# Altium PCB GPT_NLP_DC_Board.PcbDoc
Units mil, origin at the board's own origin, x right, y up, seen from the top; angles counter-clockwise.
Board outline 10710 x 6395 mil, 2 copper layers (Top Layer, Bottom Layer); 48 components, 37 nets, 185 pads, 63 vias.
Unrouted connection lines stored in the file: 3.
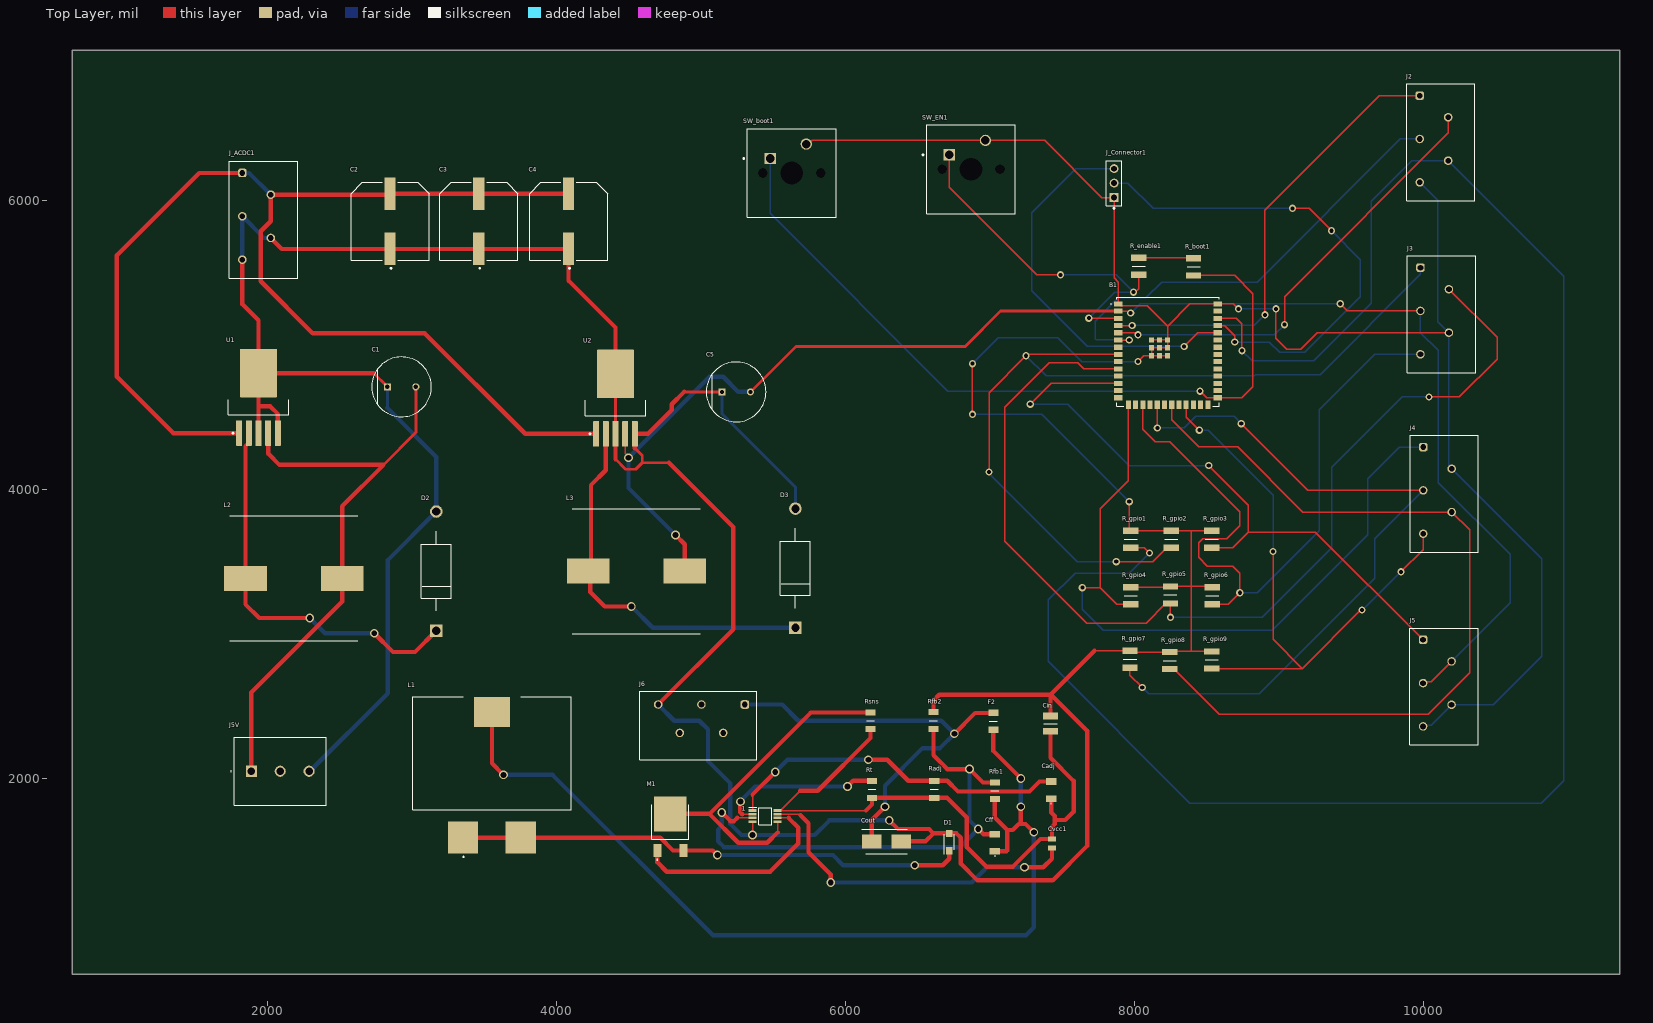
[diagram p0: Top Layer view]
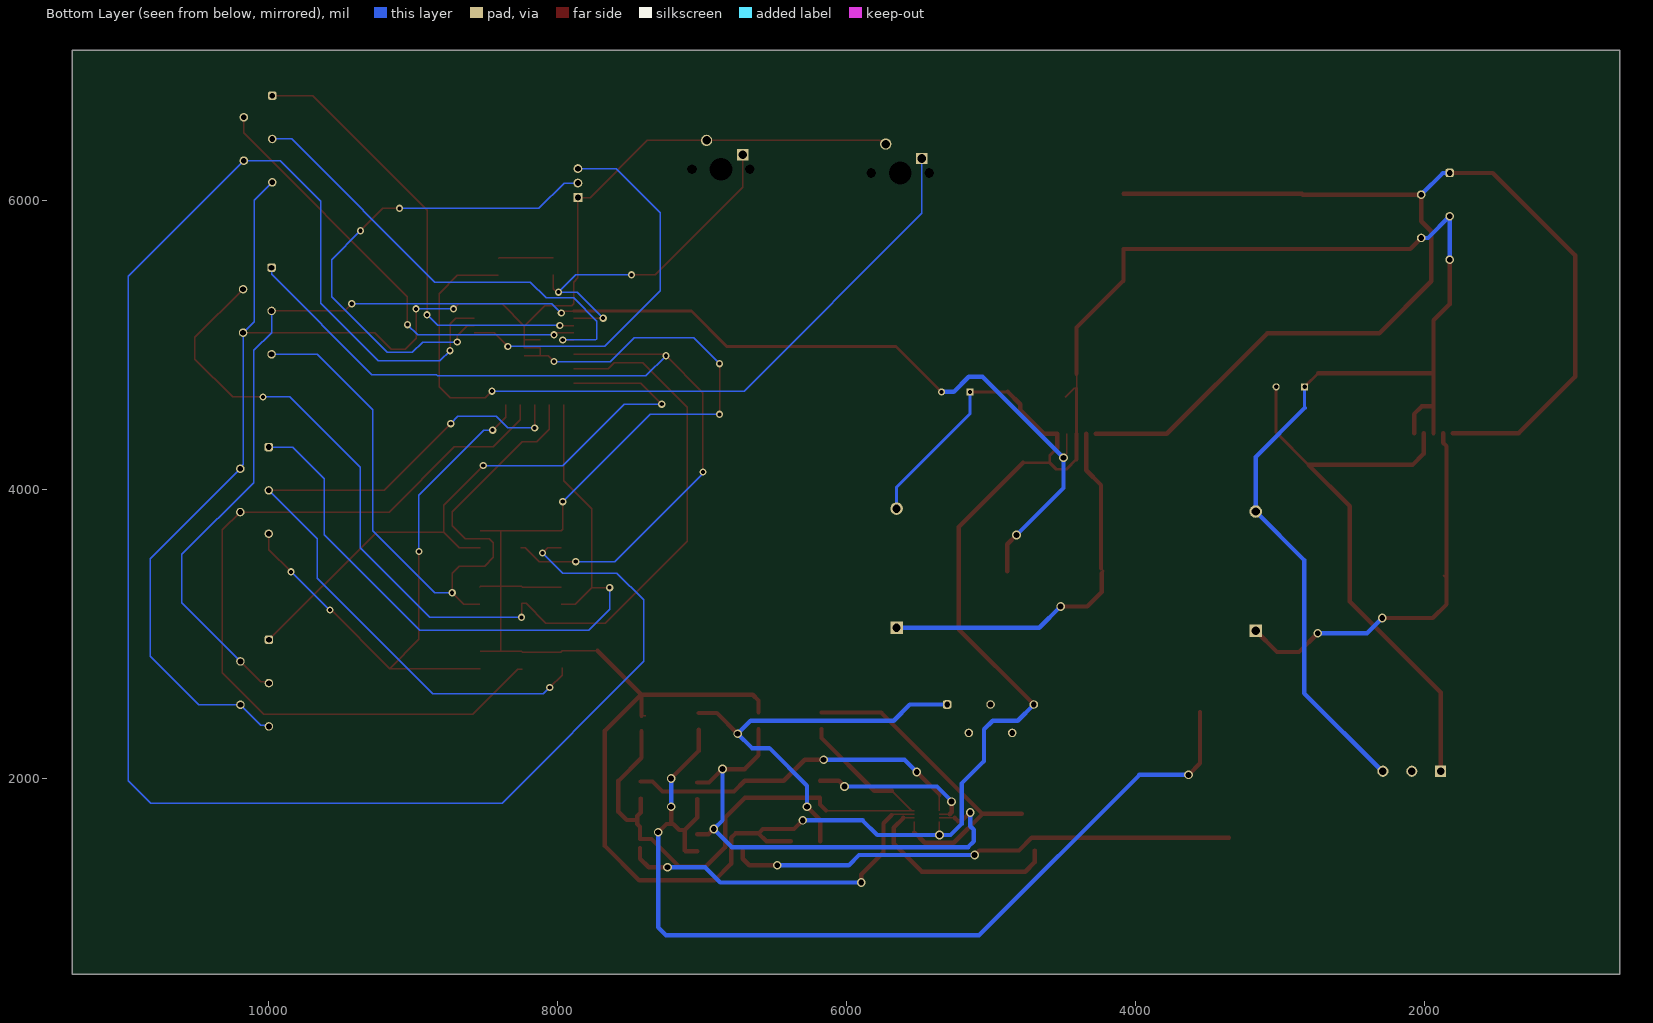
[diagram p1: Bottom Layer view, seen from below]
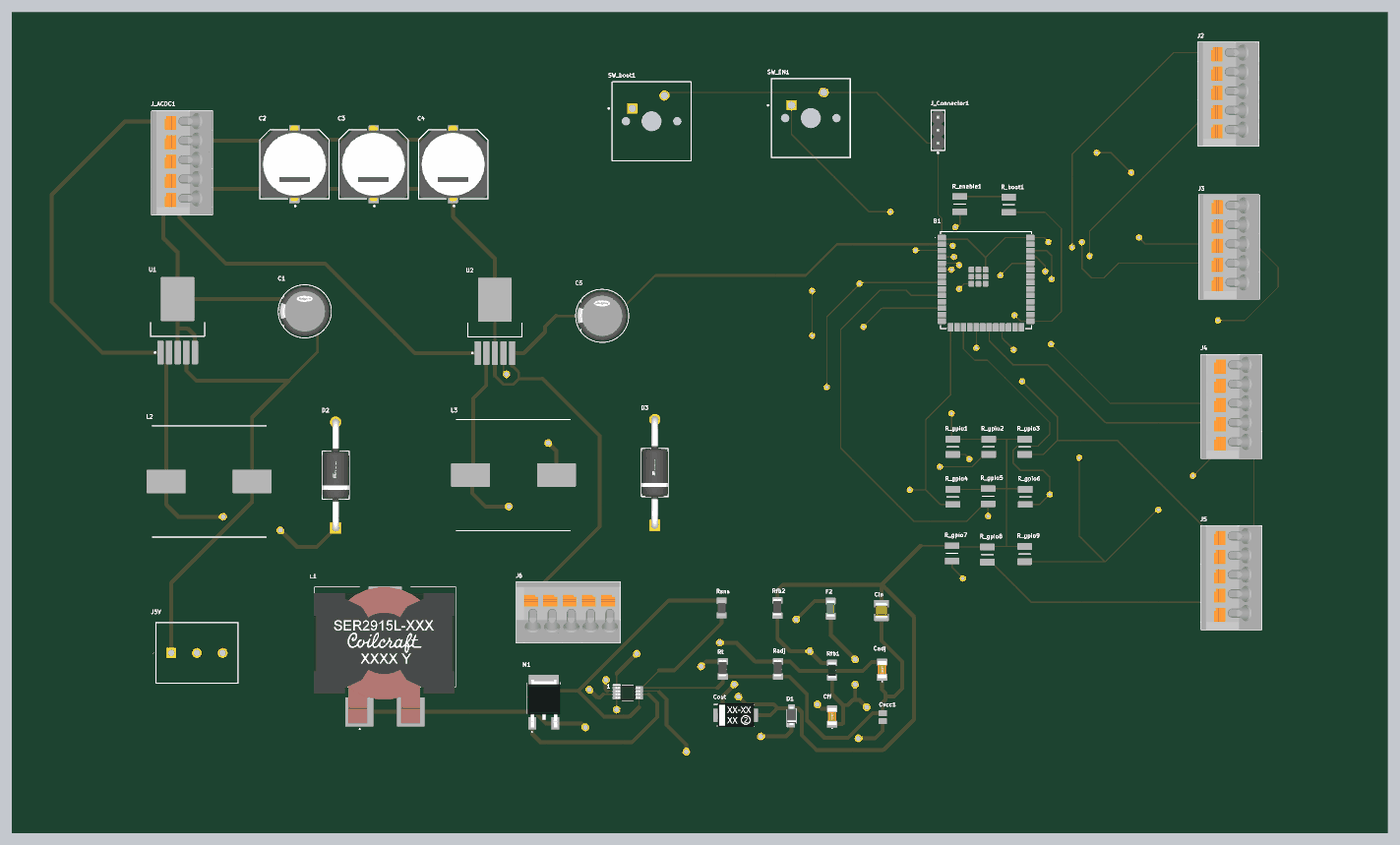
[diagram p2: 3D render of the assembled board from above, using the file's embedded part models]

## Layer stack, top to bottom
Top Solder: solder mask 0.4, Solder Resist, Dk 3.5
Top Layer: signal copper 1.4
Dielectric 1: dielectric 12.6, FR-4, Dk 4.8
Bottom Layer: signal copper 1.4
Bottom Solder: solder mask 0.4, Solder Resist, Dk 3.5

## Board outline
650,645 650,7040 11360,7040 11360,645

## Design rules (kind name [scope] priority, off if disabled: settings)
Clearance [All] p1: gap=5 ignorepadtopadclearanceinfootprint=FALSE
HoleSize [All] p1: absolutevalues=TRUE maxlimit=250 minlimit=1 maxpercent=80.000 minpercent=20.000
MinimumSolderMaskSliver [All] p1: minsoldermaskwidth=5
PasteMaskExpansion [All] p1: expansion=4
PolygonConnect [All] p1: connectstyle=Relief reliefconductorwidth=10 reliefentries=4 polygonreliefangle="90 Angle" airgapwidth=10
RoutingVias [All] p1: holewidth=28 width=50 viastyle="Through Hole" minholewidth=28 minwidth=50 maxholewidth=28 maxwidth=50
SilkToSilkClearance [All] p1: silktosilkclearance=5
SilkToSolderMaskClearance [IsPad] p1: minsilkscreentomaskgap=4 clearancetoexposedcopper=TRUE
SolderMaskExpansion [All] p1: expansion=4 istentingtop=FALSE
SupplyNets "Schematic Supply Nets_1" [InNet('GND')] p1: voltage=0.000
SupplyNets "Schematic Supply Nets_5" [InNet('19V')] p2: voltage=0.000
SupplyNets "Schematic Supply Nets_4" [InNet('REC_Volt')] p3: voltage=0.000
SupplyNets "Schematic Supply Nets_2" [InNet('3.3V')] p4: voltage=0.000
SupplyNets "Schematic Supply Nets" [InNet('5V_Buck')] p5: voltage=0.000
Width [All] p1: maxlimit=1000 minlimit=5 preferedwidth=10
25 further rules are at their usual default settings.

## Components (designator, comment, footprint, x,y, rotation, side; value= is the part's Value field where it differs from the comment)
1 "LM25085AMM_NOPB" SOP65P490X110-8N 5445,1740 r0 top
B1 "ESP32-S3-WROOM-1U-N16" ESP32S3WROOM1UN16 8233.94,4952.95 r0 top
C1 "35ZLH330MEFC10X12.5" FP-35ZLH330MEFC10X12_5-MFG 2930,4710 r0 top
C2 "EEV-FK1V681Q" FP-FKH13-MFG 2850,5855 r90 top
C3 "EEV-FK1V681Q" FP-FKH13-MFG 3465,5855 r90 top
C4 "EEV-FK1V681Q" FP-FKH13-MFG 4085,5855 r90 top
C5 "35ZLH330MEFC10X12.5" FP-35ZLH330MEFC10X12_5-MFG 5245,4675 r0 top
Cadj "C1206C102K5GACTU" C1206 7425,1920 r90 top
Cff "" C1206 7035,1555 r90 top
Cin "MSASU32MSB5106KPNA01" CAPC3225X270N 7420,2380 r90 top
Cout "293D106X9063E2TE3" CAPPM7343X430N 6285,1565 r0 top
Cvcc1 "TMK212BJ474KD-T" CAPC2012X95N 7430,1550 r90 top
D1 "SS24FL" SODFL3617X108N 6720,1560 r90 top
D2 "1N5822" FP-DO-201AD-MFG 3170,3435 r90 top
D3 "1N5822" FP-DO-201AD-MFG 5655,3455 r90 top
F2 "0407006.WR" FUSC3216X98N 7025,2395 r90 top
J2 "691412320005M" 691412320005M 10120.67,6401.57 r90 top
J3 "691412320005M" 691412320005M 10125.67,5211.57 r90 top
J4 "691412320005M" 691412320005M 10145,3970 r90 top
J5 "691412320005M" 691412320005M 10143.82,2636.57 r90 top
J5V "1548131" 1548131 1890,2050 r0 top
J6 "691412320005M" 691412320005M 4981.57,2366.18 r0 top
J_ACDC1 "691412320005M" 691412320005M 1973.82,5866.57 r90 top
J_Connector1 "PREC003SAAN-RC" FP-PREC003SAAN-RC-MFG 7860,6120 r90 top
L1 "SER2915L-153KL" SER2918H333KL 3555,2563.94 r0 top
L2 "74435584700" INDM225220X1240N 2185,3385 r0 top
L3 "74435584700" INDM225220X1240N 4555,3435 r0 top
M1 "SUD50P04-08-GE3" SIHD3N50DT4GE3 4790,1666.65 r0 top
R_boot1 "CRCW121010K0JNEAIF" RESC3225X60N 8410,5540 r90 top
R_enable1 "CRCW121010K0JNEAIF" RESC3225X60N 8030,5545 r90 top
R_gpio1 "CRCW121010K0JNEAIF" RESC3225X60N 7975,3655 r90 top
R_gpio2 "CRCW121010K0JNEAIF" RESC3225X60N 8255,3655 r90 top
R_gpio3 "CRCW121010K0JNEAIF" RESC3225X60N 8535,3655 r90 top
R_gpio4 "CRCW121010K0JNEAIF" RESC3225X60N 7975,3265 r90 top
R_gpio5 "CRCW121010K0JNEAIF" RESC3225X60N 8250,3270 r90 top
R_gpio6 "CRCW121010K0JNEAIF" RESC3225X60N 8540,3265 r90 top
R_gpio7 "CRCW121010K0JNEAIF" RESC3225X60N 7970,2825 r90 top
R_gpio8 "CRCW121010K0JNEAIF" RESC3225X60N 8245,2815.94 r90 top
R_gpio9 "CRCW121010K0JNEAIF" RESC3225X60N 8535,2820 r90 top
Radj "CRCW12062K21FKEA" RESC3216X60N 6615,1925 r90 top
Rfb1 "RC1206FR-0710KL" RESC3116X65N 7035,1915 r90 top
Rfb2 "CRCW1206499RFKEA" RESC3216X60N 6610,2400 r90 top
Rsns "CSR1206FK10L0" RESC3016X65N 6175,2400 r90 top
Rt "CRCW1206665KFKEA" RESC3216X60N 6185,1925 r90 top
SW_boot1 "MX1A-11NW" CHRY-MX1A-11NW_V 5630,6190 r0 top
SW_EN1 "MX1A-11NW" CHRY-MX1A-11NW_V 6870,6215 r0 top
U1 "LM2596S-5.0/NOPB" KTT0005B_M 1940,4637.68 r90 top
U2 "LM2596S-3.3/NOPB" KTT0005B_M 4410,4632.68 r90 top

## Footprints (in the part's own frame and the unit in brackets; to place one, negate y for a bottom-side part, rotate by r counter-clockwise, add the part's x,y. Pads: shape width x height; smd on the part's side, far side on the other; paste and mask are expansions set on the pad)
1548131 [mm]
  rect 1.95x1.95 hole 1.3: 1(0,0)
  round 1.95 hole 1.3: 2(5.08,0) 3(10.16,0)
  silkscreen extent -3.6,-6 13.2,6
691412320005M [mm] "3.81 mm Screwless 45¡ã Entry, 5p"
  rrect50% 1.5x1.5 hole 1: 1(8.215,3.7)
  round 1.5 hole 1: 2(4.405,-1.3) 3(0.595,3.7) 4(-3.215,-1.3) 5(-7.025,3.7)
  silkscreen extent -10.28,-6 10.28,6, body extent -10.27,-6 10.28,6, height 13.28
C1206 [mm]
  rect 1.15x1.8 smd: 1(-1.5,0) 2(1.5,0)
  silkscreen extent -2.4,-0.05 -2.3,0.05, body extent -1.7,-0.9 1.7,0.9, height 1.75
CAPC2012X95N [mm]
  rect 0.96x1.39 smd: 1(-0.79,0) 2(0.79,0)
CAPC3225X270N [mm]
  rect 1.22x2.72 smd: 1(-1.35,0) 2(1.35,0)
  silkscreen extent 0,-1.15 0,1.15, body extent -1.6,-1.25 1.6,1.25, height 2.7
CAPPM7343X430N [mm]
  rect 3.4x2.45 smd: 1(-2.6,0) 2(2.6,0)
  silkscreen extent -4.3,-2.15 3.65,2.15, body extent -3.59,-2.35 3.6,2.35, height 4.12
CHRY-MX1A-11NW_V [mm] "THD, 2-Leads, Body 15.6x15.6mm"
  rect 2x2 hole 1.499 paste-2539.97: 1(-3.81,2.54)
  round 2 hole 1.499 paste-2539.97: 2(2.54,5.08)
  round 0 hole 3.988 unplated paste-2539.97: MH1(0,0)
  round 0 hole 1.702 unplated paste-2539.97: MH2(-5.08,0) MH3(5.08,0)
  silkscreen extent -8.57,-7.8 7.8,7.8, body extent -7.8,-7.8 7.8,7.8, height 15.2
ESP32S3WROOM1UN16 [mm]
  rect 1.5x0.9 smd: 1(-8.75,8.41) 2(-8.75,7.14) 3(-8.75,5.87) 4(-8.75,4.6) 5(-8.75,3.33) 6(-8.75,2.06) 7(-8.75,0.79) 8(-8.75,-0.48) 9(-8.75,-1.75) 10(-8.75,-3.02) 11(-8.75,-4.29) 12(-8.75,-5.56) 13(-8.75,-6.83) 14(-8.75,-8.1) 27(8.75,-8.1) 28(8.75,-6.83) 29(8.75,-5.56) 30(8.75,-4.29) 31(8.75,-3.02) 32(8.75,-1.75) 33(8.75,-0.48) 34(8.75,0.79) 35(8.75,2.06) 36(8.75,3.33) 37(8.75,4.6) 38(8.75,5.87) 39(8.75,7.14) 40(8.75,8.41)
  rect 0.9x1.5 smd: 15(-6.985,-9.35) 16(-5.715,-9.35) 17(-4.445,-9.35) 18(-3.175,-9.35) 19(-1.905,-9.35) 20(-0.635,-9.35) 21(0.635,-9.35) 22(1.905,-9.35) 23(3.175,-9.35) 24(4.445,-9.35) 25(5.715,-9.35) 26(6.985,-9.35)
  rect 0.9x0.9 smd: 41(-1.5,0.69) 42(-1.5,2.09) 43(-2.9,2.09) 44(-2.9,0.69) 45(-2.9,-0.71) 46(-1.5,-0.71) 47(-0.1,-0.71) 48(-0.1,0.69) 49(-0.1,2.09)
  silkscreen extent -10.1,-9.6 9,9.6
FP-35ZLH330MEFC10X12_5-MFG [mm]
  rect 1.25x1.25 hole 0.75 paste-2539.97 mask+0: 1(-2.5,0)
  round 1.25 hole 0.75 paste-2539.97 mask+0: 2(2.5,0)
  silkscreen extent -5.25,-5.25 5.25,5.25, body extent -5.35,-5.35 5.35,5.35, height 0.25
FP-DO-201AD-MFG [mm]
  rect 2.2x2.2 hole 1.45 paste-2539.97 mask+0: 1(-10.47,0)
  round 2.2 hole 1.45 paste-2539.97 mask+0: 2(10.47,0)
  silkscreen extent -7,-2.65 7,2.65, body extent -11.67,-2.75 11.67,2.75, height 0.25
FP-FKH13-MFG [mm]
  rect 5.7x2 smd paste+0 mask+0: 1(-4.85,0) 2(4.85,0)
  silkscreen extent -8.37,-6.85 6.85,6.85, body extent -7.95,-7.1 7.95,7.1, height 0.25
FP-PREC003SAAN-RC-MFG [mm]
  rect 1.55x1.55 hole 1 paste-2539.97 mask+0: 1(-2.54,0)
  round 1.55 hole 1 paste-2539.97 mask+0: 2(0,0) 3(2.54,0)
  silkscreen extent -4.57,-1.37 3.96,1.37, body extent -4.06,-1.47 4.06,1.47, height 0.25
FUSC3216X98N [mm]
  rect 1.14x1.75 smd: 1(-1.48,0) 2(1.48,0)
  silkscreen extent 0,-0.69 0,0.69, body extent -1.6,-0.79 1.6,0.79, height 0.98
INDM225220X1240N [mm]
  rect 7.5x4.4 smd: 1(-8.5,0) 2(8.5,0)
  silkscreen extent -11.25,-11 11.25,11
KTT0005B_M [mm] "DPAK, 5-Leads, Body 10.65x9.65mm, Pitch 1.7mm, IPC Low Density"
  rrect10% 4.45x1.05 smd: 1(-6.3,3.4) 2(-6.3,1.7) 3(-6.3,0) 4(-6.3,-1.7) 5(-6.3,-3.4)
  rrect2% 8.5x6.45 smd: 6(4.25,0)
  silkscreen extent -6.42,-5.35 -0.4,5.35, body extent -3.1,-5.32 6.55,5.33, height 4.83
RESC3016X65N [mm]
  rect 1.05x1.75 smd: 1(-1.45,0) 2(1.45,0)
  silkscreen extent 0,-0.67 0,0.67, body extent -1.52,-0.78 1.53,0.77, height 0.55
RESC3116X65N [mm]
  rect 1.05x1.75 smd: 1(-1.45,0) 2(1.45,0)
  silkscreen extent 0,-0.7 0,0.7, body extent -1.55,-0.8 1.55,0.8, height 0.65
RESC3216X60N [mm]
  rect 1.05x1.8 smd: 1(-1.5,0) 2(1.5,0)
  silkscreen extent 0,-0.7 0,0.7, body extent -1.42,-0.74 1.78,0.86, height 0.55
RESC3225X60N [mm]
  rect 1.1x2.7 smd: 1(-1.5,0) 2(1.5,0)
  silkscreen extent 0,-1.15 0,1.15
SER2918H333KL [mm]
  rect 5.33x5.59 smd: 1(-5.075,-24.715) 2(5.075,-24.715)
  rect 6.35x5.28 smd: 3(0,-2.64)
  silkscreen extent -13.95,-28.2 13.95,0, body extent -14.12,-27.06 13.78,-0.02, height 15.59
SIHD3N50DT4GE3 [mil]
  rect 55x90 smd: 1(-90,-165) 3(90,-165)
  rect 224.02x243.31 smd: 2(0,88.35)
  silkscreen extent -128,-234 128,152, body extent -123,-195 127,175, height 93
SODFL3617X108N [mm]
  rect 1.26x1.17 smd: 1(-1.525,0) 2(1.525,0)
  silkscreen extent -2.15,-0.86 1.38,0.86, body extent -1.8,-0.86 1.8,0.86, height 1.08
SOP65P490X110-8N [mm]
  rect 1.4x0.45 smd: 1(-2.2,0.975) 2(-2.2,0.325) 3(-2.2,-0.325) 4(-2.2,-0.975) 5(2.2,-0.975) 6(2.2,-0.325) 7(2.2,0.325) 8(2.2,0.975)
  silkscreen extent -2.9,-1.5 1.15,1.55, body extent -2.45,-1.5 2.45,1.5, height 1.1

## Part data
1: "Integrated Circuit", Manufacturer_Name="Texas Instruments", Manufacturer_Part_Number=LM25085AMM/NOPB, Mouser Part Number=926-LM25085AMM/NOPB, Datasheet Link=http://www.ti.com/lit/gpn/LM25085A, Height=1.1mm, Mouser Price/Stock=https://www.mouser.co.uk/ProductDetail/Texas-Instruments/LM25085AMM-NOPB?qs=X1J7HmVL2ZFzLd0kBZ%2FkDw%3D%3D
B1: "Multiprotocol Modules SMD Module, ESP32-S3, 16 MB SPI Flash, IPEX Antenna Connector", Manufacturer_Name="Espressif Systems", Mouser Part Number=356-ESP32S3WROM1UN16, Datasheet Link=https://www.espressif.com/sites/default/files/documentation/esp32-s3-wroom-1_wroom-1u_datasheet_en.pdf, Geometry.Height=3.35mm, Manufacturer_Part_Number=ESP32-S3-WROOM-1U-N16, Mouser Price/Stock=https://www.mouser.co.uk/ProductDetail/Espressif-Systems/ESP32-S3-WROOM-1U-N16?qs=Li%252BoUPsLEntAI1ynUyotnA%3D%3D
C1 C5: library part CMP-01474-19941892-1, "35ZLH330MEFC10X12.5 Radial Can ALUMINUM ELECTROLYTIC CAPACITOR ZLH 35V 330muF ±20% 0.394Dia 10.00mm", Capacitance=330µF, Case/Package=Radial, Dielectric Material=Aluminium, ESR (Equivalent Series Resistance)=39mΩ, Leakage Current=3µA, Max Operating Temperature=105°C, Min Operating Temperature=-40°C, Ripple Current=1.33A, Tolerance=20%, Voltage=35V, Diameter=10mm, Dissipation Factor=12%, Features="General Purpose", Height=12.5mm, Height - Seated (Max)=13.9954mm, Impedance=39mΩ, Lead Diameter=600µm, Lead Free="Lead Free", Lead Pitch=5mm, Life (Hours)=10000hours, Mount="Through Hole", NexarPartId=19941892, Number of Pins=2, Radiation Hardening=No, REACH SVHC="No SVHC", Ripple Current (AC)=1.33A, RoHS=Compliant, Schedule B=8532220020, Termination=Radial, Voltage Rating=35V, Voltage Rating (AC)=35V, Voltage Rating (DC)=35V
C2 C3 C4: library part CMP-05427-002172-1, "CAP ALUM 680UF 20% 35V SMD", Capacitance=680uF, Case/Package=Radial, ESR (Equivalent Series Resistance)=60mR, Leakage Current=3uA, Max Operating Temperature=105°C, Min Operating Temperature=-55°C, Package Quantity=200, Ratings=AEC-Q200, Ripple Current=1.1A, Tolerance=20%, Voltage=35V, Construction=Cylindrical, Contact Plating=Tin, Diameter=12.5mm, Height=13.5mm, Height - Seated (Max)=0.531inch, Impedance=60mR, Lead Free="Lead Free", Length=14mm, Life (Hours)=5000Hour, Material=Aluminium, Mount="Surface Mount", Packaging="Tape and Reel", Radiation Hardening=No, Reach SVHC Compliant=Yes, Ripple Current (AC)=1.1A, RoHS Compliant=Yes, Series=FK, Termination=SMD/SMT, Voltage Rating=35V, Voltage Rating (DC)=35V, Width=900um
Cadj: "Capacitor", Manufacturer_Name=YAGEO, Datasheet Link=https://content.kemet.com/datasheets/KEM_C1003_C0G_SMD.pdf, Manufacturer_Part_Number=C1206C102K5GACTU
Cff: library part C1206C333K5RACTU, "Capacitor", Manufacturer_Name=YAGEO, Mouser Part Number=80-C1206C333K5R, Datasheet Link=https://content.kemet.com/datasheets/KEM_C1002_X7R_SMD.pdf, Manufacturer_Part_Number=C1206C333K5RACTU, Mouser Price/Stock=https://www.mouser.com/Search/Refine.aspx?Keyword=80-C1206C333K5R
Cin: "Capacitor", Manufacturer_Name="TAIYO YUDEN", Datasheet Link=https://4donline.ihs.com/images/VipMasterIC/IC/TAIY/TAIY-S-A0018972909/TAIY-S-A0018972909-1.pdf?hkey=61A2E4C270F0397D049F8F05BD4F1054, Height=2.7mm, Manufacturer_Part_Number=MSASU32MSB5106KPNA01
Cout: "Capacitor Polarised", Manufacturer_Name=Vishay, Mouser Part Number=74-293D106X9063E2TE3, Arrow Part Number=293D106X9063E2TE3, Arrow Price/Stock=https://www.arrow.com/en/products/293d106x9063e2te3/vishay, Datasheet Link=http://www.vishay.com/docs/40002/293d.pdf, Height=4.3mm, Manufacturer_Part_Number=293D106X9063E2TE3, Mouser Price/Stock=https://www.mouser.co.uk/ProductDetail/Vishay-Sprague/293D106X9063E2TE3?qs=CPcc0c%2Fon9Gw9HhZerL1xQ%3D%3D
Cvcc1: "TAIYO YUDEN - TMK212BJ474KD-T - CERAMIC CAPACITOR 0.47UF, 25V, X5R, 10%, 0805", Manufacturer_Name="TAIYO YUDEN", Mouser Part Number=963-TMK212BJ474KD-T, Datasheet Link=https://componentsearchengine.com/Datasheets/2/TMK212BJ474KD-T.pdf, Geometry.Height=0.95mm, Manufacturer_Part_Number=TMK212BJ474KD-T, Mouser Price/Stock=https://www.mouser.co.uk/ProductDetail/TAIYO-YUDEN/TMK212BJ474KD-T?qs=PzICbMaShUcnyRLJVHq5%252BA%3D%3D
D1: "Schottky Diode", Manufacturer_Name=onsemi, Mouser Part Number=512-SS24FL, Arrow Part Number=SS24FL, Arrow Price/Stock=https://www.arrow.com/en/products/ss24fl/on-semiconductor?utm_currency=USD&region=europe, Datasheet Link=https://www.onsemi.com/pub/Collateral/SS26FL-D.PDF, Height=1.08mm, Manufacturer_Part_Number=SS24FL, Mouser Price/Stock=https://www.mouser.co.uk/ProductDetail/onsemi-Fairchild/SS24FL?qs=tqW9UTzndZyvT5hdH%252BfSxg%3D%3D
D2 D3: library part CMP-12187-000025-1, "DIODE SCHOTTKY 40V 3A DO201AD", Forward Current=3A, Manufacturer=STMicroelectronics, Max Junction Temp=+150°C, Max Repetitive Reverse Voltage=40V, Max Surge Forward Current=80A, Package=DO-201AD, Peak Reverse Current=2mA, Temperature="to +150°C", Automotive=No, Category=Diode, ComponentLink2Description=Datasheet, ComponentLink2URL=https://www.st.com/resource/en/datasheet/1n5822.pdf, Device Class L1="Discrete Semiconductors", Device Class L2=Diodes, Device Class L3="Schottky Diodes", Digikey Description="DIODE SCHOTTKY 40V 3A DO201AD", Height=5.3mm, Lead Free=Yes, Manufacturer Part Number=1N5822, Mouser Description="Schottky Diodes & Rectifiers Vr/40V Io/3A BULK", Octopart=https://octopart.com/1n5822-stmicroelectronics-323225, RoHS=TRUE, Temperature Range High=+150°C
F2: "Fuse", Manufacturer_Name=LITTELFUSE, Mouser Part Number=576-0407006.WR, Arrow Part Number=0407006.WR, Arrow Price/Stock=https://www.arrow.com/en/products/0407006.wr/littelfuse?utm_currency=USD&region=nac, Datasheet Link=https://m.littelfuse.com/~/media/electronics/datasheets/littelfuse_fuse_407_datasheet.pdf.pdf, Height=0.985mm, Manufacturer_Part_Number=0407006.WR, Mouser Price/Stock=https://www.mouser.co.uk/ProductDetail/Littelfuse/0407006.WR?qs=sPbYRqrBIVmH0oD7q%252BOKfw%3D%3D
J2 J3 J4 J5 J6 J_ACDC1: library part CMP-03913-78871500-2, "Terminal Block, 3.81MM Pitch, 45 Deg, Screwless, 16 -30 AWG, 5 Pins", Lead Pitch=3.81mm, Number of Pins=5, Packaging=Box
J5V: "Pluggable Terminal Blocks SMKDSN 1,5/ 3-5,08 SPE", Manufacturer_Name="Phoenix Contact", Mouser Part Number=651-1548131, Datasheet Link=https://www.phoenixcontact.com/en-be/products/pcb-terminal-block-smkdsn-15-3-508-spe-1548131, Geometry.Height=11.15mm, Manufacturer_Part_Number=1548131, Mouser Price/Stock=https://www.mouser.co.uk/ProductDetail/Phoenix-Contact/1548131?qs=ulEaXIWI0c9GjnZKo%252BcsiA%3D%3D
J_Connector1: library part CMP-00595-22265080-1, "PREC003SAAN-RC Conn Header Vert 3POS 2.54MM", Color=Black, Current Rating=3A, Max Operating Temperature=105°C, Min Operating Temperature=-40°C, Connector Type="Male Pin", Contact Material="Nickel, Tin", Contact Mating Length=5.842mm, Contact Plating=Tin, Height=8.74mm, Mount="Through Hole", NexarPartId=22265080, Number of Contacts=3, Number of Positions=3, Number of Rows=1, Packaging=Bulk, Pitch=2.54mm, RoHS=Compliant, Termination=Solder
L1: "Inductor", Manufacturer_Name=COILCRAFT, Mouser Part Number=994-SER2915L-153KL, Datasheet Link=https://www.coilcraft.com/pdfs/ser2900.pdf, Height=17mm, Manufacturer_Part_Number=SER2915L-153KL, Mouser Price/Stock=https://www.mouser.co.uk/ProductDetail/Coilcraft/SER2915L-153KL?qs=zCSbvcPd3pYvEeXdEWrnlg%3D%3D
L2 L3: "Wurth WE-HCI Series Shielded Wire-wound SMD Inductor with a MnZn Core, 47 uH +/-20% Flat Wire Winding 9A Idc", Manufacturer_Name="Wurth Elektronik", Mouser Part Number=710-74435584700, Datasheet Link=https://componentsearchengine.com/Datasheets/2/74435584700.pdf, Geometry.Height=12.4mm, Manufacturer_Part_Number=74435584700, Mouser Price/Stock=https://www.mouser.co.uk/ProductDetail/Wurth-Elektronik/74435584700?qs=BXmE%252BJ0Y7xb1gG6%252BIK8ZPg%3D%3D
M1: "MOSFET (P-Channel)", Manufacturer_Name=Vishay, Mouser Part Number=781-SUD50P04-08-GE3, Arrow Part Number=SUD50P04-08-GE3, Arrow Price/Stock=https://www.arrow.com/en/products/sud50p04-08-ge3/vishay?region=europe, Datasheet Link=https://www.vishay.com/docs/65594/sud50p04-08.pdf, Height=2.38mm, Manufacturer_Part_Number=SUD50P04-08-GE3, Mouser Price/Stock=https://www.mouser.co.uk/ProductDetail/Vishay-Semiconductors/SUD50P04-08-GE3?qs=WX95TUc1y56BTDQkv3VCeQ%3D%3D
R_boot1 R_enable1 R_gpio1 R_gpio2 R_gpio3 R_gpio4 R_gpio5 R_gpio6 R_gpio7 R_gpio8 R_gpio9: "10 kOhms +/-5% 0.5W, 1/2W Chip Resistor 1210 (3225 Metric) Automotive AEC-Q200, Pulse Withstanding Thick Film", Manufacturer_Name=Vishay, Mouser Part Number=71-CRCW121010K0JNAIF, Datasheet Link=https://www.vishay.com/docs/20024/dcrcwife3.pdf, Geometry.Height=0.6mm, Manufacturer_Part_Number=CRCW121010K0JNEAIF, Mouser Price/Stock=https://www.mouser.co.uk/ProductDetail/Vishay-Dale/CRCW121010K0JNEAIF?qs=i8QVZAFTkqQfG5tTLsUS4Q%3D%3D
Radj: "Resistor", Manufacturer_Name=Vishay, Mouser Part Number=71-CRCW1206-2.21K-E3, Arrow Part Number=CRCW12062K21FKEA, Arrow Price/Stock=https://www.arrow.com/en/products/crcw12062k21fkea/vishay, Datasheet Link=http://www.vishay.com/docs/20035/dcrcwe3.pdf, Height=0.6mm, Manufacturer_Part_Number=CRCW12062K21FKEA, Mouser Price/Stock=https://www.mouser.co.uk/ProductDetail/Vishay-Dale/CRCW12062K21FKEA?qs=v%252BxIQaJyuQoaBZMU5qB9Lw%3D%3D
Rfb1: "Resistor", Manufacturer_Name=YAGEO, Mouser Part Number=603-RC1206FR-0710KL, Arrow Part Number=RC1206FR-0710KL, Arrow Price/Stock=https://www.arrow.com/en/products/rc1206fr-0710kl/yageo?utm_currency=USD&region=europe, Datasheet Link=https://www.yageo.com/upload/media/product/app/datasheet/rchip/pyu-rc_group_51_rohs_l.pdf, Height=0.65mm, Manufacturer_Part_Number=RC1206FR-0710KL, Mouser Price/Stock=https://www.mouser.co.uk/ProductDetail/YAGEO/RC1206FR-0710KL?qs=%252BhB4WxZmbVEJV82xdVgRUw%3D%3D
Rfb2: "Resistor", Manufacturer_Name=Vishay, Mouser Part Number=71-CRCW1206-499-E3, Datasheet Link=http://www.vishay.com/docs/20035/dcrcwe3.pdf, Height=0.6mm, Manufacturer_Part_Number=CRCW1206499RFKEA, Mouser Price/Stock=https://www.mouser.com/Search/Refine.aspx?Keyword=71-CRCW1206-499-E3
Rsns: "Resistor", Manufacturer_Name="Stackpole Electronics", Arrow Part Number=CSR1206FK10L0, Arrow Price/Stock=https://www.arrow.com/en/products/csr1206fk10l0/stackpole-electronics?region=nac, Datasheet Link=https://cs.seielect.com/catalog/SEI-CSR_CSRN.pdf, Height=0.65mm, Manufacturer_Part_Number=CSR1206FK10L0
Rt: "Resistor", Manufacturer_Name=Vishay, Height=0.6mm, Manufacturer_Part_Number=CRCW1206665KFKEA
SW_boot1 SW_EN1: library part CMP-2000-06786-1, "Keylock Switch, 12 V, -10 to 70 degC, 2-Pin THD, RoHS, Bulk", Actuator Color=N/A, Illumination Color=N/R, Manufacturer=Cherry, Maximum AC Voltage Rating=12V, Maximum Contact Resistance=200mOhm, Maximum Current Rating=0.01A, Minimum Insulation Resistance=100MOhm, Operating Force=0.58N, Operating Temperature=-10to70C, Package Description="2-Pin Through Hole Device, Body 15.6 x 15.6 mm", Part No=MX1A11NW, Actuator Length=3.6mm, Actuator Material=N/A, Actuator Style=Button, Body Orientation=Straight, Contact Material=Silver/Gold, Contact Plating=N/A, COO=UK, Datasheet URL=https://cdn.sparkfun.com/datasheets/Components/Switches/MX%20Series.pdf, Datasheet Version=09/2000, Dielectric Strength=N/A, Dimension=15.6x15.6x15.2mm, ECCN=EAR99, Electrical Life=50000000Cycle, Family=MX, Housing Material=N/A, HTS=8536509065, Illumination Type=N/R, IP Rating=N/A, Manufacturer URL=http://cherryswitches.com/cn/, Maximum DC Voltage Rating=12V, Maximum Power Rating=N/A, Mechanical Life=N/A, Mounting=ThroughHole, Mounting Technology=ThroughHole, Number of Terminals=2, Operating Speed=N/A, Package Reference=MX1A-11NW, Packaging=N/A, Pole Throw Configuration=SPST, RoHS=Unknown, Row Spacing=6.35mm, Supplier=CherryElectrical, Switch Configuration=N.O., Terminal Pitch=2.54mm, Terminal Type=PCPins, Total Travel=4.06mm, Type=DesktopProfile
U1: library part CMP-0069-00269-3, "SIMPLE SWITCHER® Power Converter 150 KHz 3A Step-Down Voltage Regulator, 5-pin TO-263, Pb-Free", Manufacturer="Texas Instruments", PackageTopMarking="NSUZXYTTE#*LM2596S*-5.0 P+", PowerWise=N, Code_JEDEC=MO-169-AB, ComponentLink1Description="Datasheet URL", ComponentLink1URL=http://www.ti.com/general/docs/lit/getliterature.tsp?genericPartNumber=LM2596&fileType=pdf, CompType=Switcher, PackageDescription="TO-263, Molded, .400 x .390 x .180in, 5 Lead, .067in Pitch, Surface Mount", PackageReference=KTT0005B, PinCount=5, RoHS=Y
U2: library part CMP-0069-00275-3, "SIMPLE SWITCHER® Power Converter 150 KHz 3A Step-Down Voltage Regulator, 5-pin TO-263, Pb-Free", Manufacturer="Texas Instruments", PackageTopMarking="NSUZXYTTE#*LM2596S*-3.3 P+", PowerWise=N, Code_JEDEC=MO-169-AB, ComponentLink1Description="Datasheet URL", ComponentLink1URL=http://www.ti.com/general/docs/lit/getliterature.tsp?genericPartNumber=LM2596&fileType=pdf, CompType=Switcher, PackageDescription="TO-263, Molded, .400 x .390 x .180in, 5 Lead, .067in Pitch, Surface Mount", PackageReference=KTT0005B, PinCount=5, RoHS=Y

## Via types
v1: diameter 50, hole 28, Top Layer to Bottom Layer, 39 vias
v2: diameter 60, hole 40, Top Layer to Bottom Layer, 24 vias

## Nets (pads, with @x,y where several pads share a name; then routed paths per layer and width w, separated by ;. In a path a pad name is that pad's centre, name@x,y a point inside that pad or via, vN(x,y) a via of type N, cw(c..) or ccw(c..) an arc to the next point about the centre after c; other vN are vias at no path point)
3.3V: B1.2 C5.2 J3.3 J5.2 J5.3 L3.2 U2.4 | length 10272.2
  Top Layer w10: U2.4 4476.93,4250.86 4500,4227.79 v2(4500,4220) ; B1.2 7960.94,5234.06 v1(7975,5220) ; v1(9425,5285) 9475,5235 J3.3 ; J5.3 9998.15,2658.15 10009.39,2669.39 10054.39,2669.39 J5.2
  Top Layer w20: C5.2 5658.43,4990 6830,4990 7074.06,5234.06 B1.2
  Top Layer w30: v2(4825,3685) 4889.65,3620.35 L3.2
  Bottom Layer w10: v1(7975,5220) 8040,5285 v1(9425,5285) ; J3.3 9980,5085 10102.5,4962.5 10102.5,4047.5 10600,3550 10600,3215 J5.2
  Bottom Layer w30: v2(4825,3685) 4500,4010 v2(4500,4220) 5060,4780 5155,4780 5260,4675 C5.2
5V_Buck: C1.2 J5V.1 L2.2 U1.4 | length 4103.5
  Top Layer w20: 2805,4170 3028.43,4393.43 C1.2
  Top Layer w30: J5V.1 1890,2595 2519.65,3224.65 L2.2 2519.65,3884.65 2805,4170 2085,4170 2006.93,4248.07 U1.4
19V: Cout.1 F2.2 J6.1 | length 2915.3
  Top Layer w30: Cout.1 6182.64,1712.64 v2(6275,1805) ; v2(6755,2310) 6898.27,2453.27 F2.2
  Bottom Layer w30: J6.1 5563.15,2511.85 5675,2400 6665,2400 v2(6755,2310) 6655,2210 6535,2210 6275,1950 v2(6275,1805)
DIR: B1.5 J2.2 | length 3090
  Top Layer w10: B1.5 7890.39,5085 8010,5085 v1(8025,5070) ; v1(9040,5140) 9040,5335 10171.85,6466.85 J2.2
  Bottom Layer w10: v1(8025,5070) 8970,5070 v1(9040,5140)
ENABLE: B1.6 J2.3 | length 3204.4
  Top Layer w10: B1.6 7964.06,5034.06 v1(7965,5035)
  Bottom Layer w10: v1(7965,5035) 7735.86,5035 7730,5040.86 7730,5165 7890,5325 8080,5325 8190,5435 8850,5435 9840,6425 J2.3
FB_Pin: 1.3 Cff.2 Rfb1.2 Rfb2.1 | length 3579.7
  Top Layer w10: 5252.2,1727.2 1.3
  Top Layer w30: v2(5145,1765) 5205.07,1704.93 5229.93,1704.93 5252.2,1727.2 ; Rfb2.1 6610,2160 6705,2065 v2(6860,2065) 6952.91,1972.09 Rfb1.2 ; v2(6920,1650) 6955.94,1614.06 Cff.2
  Bottom Layer w30: v2(5145,1765) 5145,1670 5120,1645 5120,1565 5160,1525 6795,1525 v2(6920,1650) 6860,1710 v2(6860,2065)
GND: 1.4 B1.1 B1.40 B1.41 B1.42 B1.43 B1.44 B1.45 B1.46 B1.47 B1.48 B1.49 C1.1 C2.1 C3.1 C4.1 C5.1 Cin.2 Cout.2 D1.2 D2.2 D3.2 J2.5 J3.4 J4.2 J5.4 J5.5 J5V.3 J6.5 J_ACDC1.3 J_ACDC1.4 J_ACDC1.5 J_Connector1.1 R_gpio1.2 R_gpio2.2 R_gpio3.2 R_gpio4.2 R_gpio5.2 R_gpio6.2 R_gpio7.2 R_gpio8.2 R_gpio9.2 Rfb2.2 SW_boot1.2 SW_EN1.2 U1.3 U1.5 U1.6 U2.3 U2.5 U2.6 | length 38538.3
  Top Layer w10: U2.6 4410,4700 4424.14,4700 U2.6@4486.47,4637.68 ; v2(5358.39,1608.39) 1.4 ; SW_boot1.2 5745.23,6390 5770.23,6415 SW_EN1.2 7380,6415 7775,6020 J_Connector1.1 7860,5465 7890,5435 7890,5284.61 B1.1 7902.17,5271.34 8088.66,5271.34 8230,5130 ; v1(6880,4520) v1(6880,4870) ; Cin.2@7390.47,2433.15 Cin.2 ; 7420,2580 7422.91,2580 ; 7724.06,2884.06 R_gpio7.2 7979.06,2875 R_gpio8.2 8249.06,2879.06 8392.03,2879.06 ; v1(7965,3915) 7965,3724.06 R_gpio1.2 R_gpio2.2 8395,3714.06 ; R_gpio4.2 8245,3324.06 R_gpio5.2 8392.5,3329.06 ; v1(8025,4885) 8065,4925 B1.45 ; B1.43 B1.42 B1.49 ; B1.47 B1.46 B1.45 ; R_gpio9.2 8392.03,2879.06 ; R_gpio3.2 8395,3714.06 ; R_gpio6.2 8535,3329.06 8392.5,3329.06 ; v1(8720,5250) 8685.94,5284.06 B1.40 8384.06,5284.06 8230,5130 ; v1(8980,5250) 8980,5045 9055,4970 9150,4970 9265,5085 J3.4 ; B1.45 B1.44 B1.41 B1.48 B1.49 ; B1.49 8230,5130 ; 8392.03,2879.06 8392.5,2879.53 8392.5,3329.06 ; 8392.5,3329.06 8395,3331.56 8395,3714.06
  Top Layer w20: 2736.57,4805 C1.1 ; 4410,4210 4480,4140 4550,4140 4595,4185 ; U2.3 U2.6@4410,4700 ; 4543.86,4286.14 4595,4235 4595,4185 ; 4780,4185 4595,4185 ; 4885,4675 C5.1
  Top Layer w30: J_ACDC1.5 1828.15,5281.85 1940,5170 U1.6 ; U1.3 1940,4575 ; J_ACDC1.4 2100.94,5664.06 C2.1 C3.1 C4.1 4085,5445 4410,5120 U2.6 ; U1.5 2073.86,4521.14 2020,4575 1940,4575 ; 2736.57,4805 U1.6 ; 4410,4210 U2.3 ; 4543.86,4286.14 U2.5 4634.65,4384.65 4800,4550 4800,4590 4885,4675 ; J6.5 5225,3031.85 5225,3740 4780,4185 ; v2(6305,1710) 6365,1650 6580.08,1650 6610.04,1620.04 ; Cout.2 6555,1565 6610.04,1620.04 ; Rfb2.2 6610,2540 6650,2580 7422.91,2580 7673.27,2329.65 7673.27,1533.27 7435,1295 6915,1295 6800,1410 6800,1590 6769.96,1620.04 D1.2 6610.04,1620.04 ; Cin.2 7420,2580 7724.06,2884.06 ; 1940,4575 U1.6
  Bottom Layer w10: J5V.3 J5V.3@2295,2050 ; v1(6880,4520) 7360,4520 v1(7965,3915) ; v1(6880,4870) 7060,5050 7470,5050 7635,4885 v1(8025,4885) ; v1(8720,5250) v1(8980,5250) ; J2.5 10100,6000 10100,5161.85 J3.4 10176.85,4176.03 10196.18,4156.7 J4.2 10820,3519.61 10820,2845 10485,2510 J5.4 10054.39,2369.39 10007.54,2369.39 J5.5
  Bottom Layer w20: 2831.57,4563.43 C1.1 ; C5.1 5146.57,4523.43 5655,4015 D3.2
  Bottom Layer w30: J_ACDC1.5 J_ACDC1.3 1978.15,5740 J_ACDC1.4 ; J5V.3@2295,2050 2835,2590 2835,3512.2 D2.2 3170,4225 2831.57,4563.43 ; J6.5 4816.85,2400 4990,2400 5050,2340 5050,2120 5205,1965 5205,1685 5281.61,1608.39 v2(5358.39,1608.39) 5788.39,1608.39 5890,1710 v2(6305,1710)
GPIO2: B1.38 J2.4 R_gpio1.1 | length 12870.5
  Top Layer w10: R_gpio1.1 8069.06,3595.94 v1(8105,3560) ; B1.38 8705.94,5184.06 8745,5145 v1(8745,4960)
  Bottom Layer w10: v1(8105,3560) 7965,3420 7590,3420 7405,3235 7405,2810 8385,1830 10815,1830 10970,1985 10970,5476.85 J2.4 9920,6275 9640,5995 9640,5290 9240,4890 8815,4890 v1(8745,4960)
GPIO3: B1.15 J4.1 R_gpio4.1 | length 5050.7
  Top Layer w10: v1(7640,3320) 7765,3320 ; B1.15 7958.94,4058.94 7765,3865 7765,3320 ; R_gpio4.1 7879.06,3205.94 7765,3320
  Bottom Layer w10: v1(7640,3320) 7640,3170 7785,3025 8955,3025 9615,3685 9615,4075 9833.43,4293.43 J4.1
GPIO8: B1.12 J5.1 R_gpio3.1 | length 4471
  Top Layer w10: v1(7280,4590) 7424.06,4734.06 B1.12 ; v1(8515,4165) 8790,3890 8790,3705 ; R_gpio3.1 8680.94,3595.94 8790,3705 ; J5.1 9253.15,3705 8790,3705
  Bottom Layer w10: v1(7280,4590) 7540,4590 7965,4165 v1(8515,4165)
GPIO9: B1.17 J3.5 R_gpio6.1 | length 4717
  Top Layer w10: B1.17 8058.94,4416.06 8145,4330 8245,4330 8730,3845 8730,3750 8640,3660 8475,3660 8445,3630 8445,3530 8505,3470 8680,3470 8730,3420 v1(8730,3285) 8650.94,3205.94 R_gpio6.1
  Bottom Layer w10: v1(8730,3285) 8850,3285 9280,3715 9280,4550 9665,4935 J3.5
GPIO11: B1.19 J4.3 R_gpio7.1 | length 5121.8
  Top Layer w10: R_gpio7.1 7970,2715 v1(8055,2630) ; v1(8158.94,4426.06) B1.19 ; v1(8740,4455) 9201.57,3993.43 J4.3
  Bottom Layer w10: v1(8055,2630) 8100,2585 8865,2585 9665,3385 9665,3659.09 J4.3 ; v1(8158.94,4426.06) 8346.06,4426.06 8425,4505 8690,4505 v1(8740,4455)
GPIO13: B1.21 J4.4 R_gpio8.1 | length 5792.1
  Top Layer w10: R_gpio8.1 8276.5,2756.89 8588.39,2445 10035,2445 10320,2730 10320,3719.61 J4.4 9166.57,3843.43 8715,4295 8445,4295 8258.94,4481.06 B1.21
GPIO15: B1.8 J3.1 R_gpio2.1 | length 6237.5
  Top Layer w10: v1(6995,4120) 6995,4670 v1(7250,4925) ; v1@7255,4915 7274.06,4934.06 B1.8 ; v1(7875,3500) 8127.56,3500 8223.5,3595.94 R_gpio2.1
  Bottom Layer w10: v1@6990,4115 7605,3500 v1(7875,3500) ; v1(7250,4925) 7390,4785 8830,4785 8840,4795 9285,4795 9980,5490 J3.1
GPIO17: B1.10 J3.2 R_gpio5.1 | length 7338.7
  Top Layer w10: B1.10 7650.94,4834.06 7610,4875 7410,4875 7102.31,4567.31 7102.31,3642.69 7670,3075 8082.56,3075 8218.5,3210.94 R_gpio5.1 v1(8250,3115) ; v1(10040,4640) 10250,4640 10510,4900 10510,5051.85 J3.2
  Bottom Layer w10: v1(8250,3115) 8885,3115 9367.5,3597.5 9367.5,4152.5 9855,4640 v1(10040,4640)
GPIO21: B1.23 J4.5 R_gpio9.1 | length 4109.9
  Top Layer w10: B1.23 8358.94,4501.06 v1(8450,4410) ; R_gpio9.1 9160.94,2760.94 ; v1(8960,3570) 8960,2961.89 9160.94,2760.94 ; v1@9575,3175 9160.94,2760.94 ; v1(9845,3430) 9999.33,3584.33 J4.5
  Bottom Layer w10: v1(8450,4410) 8510,4410 8960,3960 v1(8960,3570) ; v1(9575,3165) 9577.5,3165 9842.5,3430 v1(9845,3430)
GPIO48: B1.25
GPIO_IO0: B1.27 R_boot1.1 SW_boot1.1 | length 5387.1
  Top Layer w10: R_boot1.1 8694.06,5480.94 8820,5355 8820,4710 8744.06,4634.06 B1.27 8500.94,4634.06 v1(8455,4680)
  Bottom Layer w10: SW_boot1.1 5480,5910 6710,4680 v1(8455,4680)
Isen: 1.5 M1.2 Rsns.2 | length 2334.9
  Top Layer w10: 5531.61,1626.61 1.5
  Top Layer w30: M1.2 5060,1755 ; 5531.61,1626.61 5460,1555 5260,1555 5060,1755 ; Rsns.2 5762.09,2457.09 5060,1755
Mid_ref: 
Net1_1: 1.1 Cadj.2 Radj.2 | length 2396.4
  Top Layer w10: 1.1 5358.39,1888.39
  Top Layer w30: 5358.39,1888.39 v2(5515,2045) ; v2(6160,2130) 6290,2130 6435.94,1984.06 Radj.2 6705.94,1984.06 6780,1910 7275,1910 7344.06,1979.06 Cadj.2
  Bottom Layer w30: v2(5515,2045) 5600,2130 v2(6160,2130)
Net1_2: 1.2 Rt.2 | length 1138.1
  Top Layer w10: 5287.2,1752.8 1.2
  Top Layer w30: v2(5275,1840) 5272.56,1837.56 5272.56,1767.44 5287.2,1752.8 ; v2(6015,1945) 6054.06,1984.06 Rt.2
  Bottom Layer w30: v2(5275,1840) 5275,1845 5375,1945 v2(6015,1945)
Net1_6: 1.6 M1.1 | length 1445.6
  Top Layer w10: 1.6 5607.8,1727.2
  Top Layer w30: M1.1 4700,1420 4765,1355 5480,1355 5675,1550 5675,1660 5607.8,1727.2
Net1_7: 1.7 Cvcc1.1 | length 2385.8
  Top Layer w10: 1.7 5674.41,1752.8 5682.2,1745 5690,1745
  Top Layer w30: 5690,1745 5745,1690 5745,1490 5900,1335 v2(5900,1280) ; v2(7240,1385) 7370,1385 7430,1445 Cvcc1.1
  Bottom Layer w30: v2(5900,1280) 6875,1280 6980,1385 v2(7240,1385)
NetB1_3: B1.3 R_enable1.1 SW_EN1.1 | length 2528.1
  Top Layer w10: SW_EN1.1 6720,6090 7325,5485 v1(7490,5485) ; v1(7685,5185) 7888.5,5185 B1.3 ; v1@8000,5360 8030,5390 R_enable1.1
  Bottom Layer w10: v1(7490,5485) 7875,5485 v1(7995,5365) 7865,5365 v1(7685,5185)
NetCff_1: Cff.1 F2.1 L1.3 Rfb1.1 | length 6715.4
  Top Layer w10: 7115.09,1495.94 7120.94,1501.8
  Top Layer w30: L1.3 3555,2105 v2(3635,2025) ; F2.1 7025,2190 v2(7215,2000) ; Cff.1 7115.09,1495.94 ; Rfb1.1 7035,1729.72 7120.94,1643.78 ; 7120.94,1501.8 7120.94,1643.78 ; v2(7215,1805) 7215,1693.67 7223.67,1685 ; v2(7305,1627.35) 7247.35,1685 7223.67,1685 ; 7120.94,1643.78 7158.78,1643.78 7200,1685 7223.67,1685
  Bottom Layer w30: v2(3635,2025) 3975,2025 5085,915 7250,915 7305,970 v2(7305,1627.35) ; v2@7215,1806.76 v2(7215,2000)
NetD1_1: D1.1 L1.1 L1.2 M1.3 | length 3517.5
  Top Layer w30: L1.1 L1.2 4719.09,1590.91 4808.35,1501.65 M1.3 5083.35,1501.65 v2(5115,1470) ; v2(6480,1400) 6675,1400 6720,1445 D1.1
  Bottom Layer w30: v2(5115,1470) 5915,1470 5985,1400 v2(6480,1400)
NetD2_1: D2.1 L2.1 U1.2 | length 2743.9
  Top Layer w10: L2.1 L2.1@1873.07,3407.72
  Top Layer w30: U1.2 1873.07,4322.72 1850.35,4300 L2.1 1850.35,3204.65 1945,3110 v2(2295,3110) ; v2(2740,3005) 2870,2875 3022.2,2875 D2.1
  Bottom Layer w30: v2(2295,3110) 2400,3005 v2(2740,3005)
NetD3_1: D3.1 L3.1 U2.2 | length 2673.9
  Top Layer w10: L3.1@4235,3420.35 L3.1 L3.1@4240,3454.65
  Top Layer w30: L3.1@4235,3420.35 4235,3290 4335,3190 v2(4520,3190) ; L3.1@4240,3454.65 4240,4030 4343.07,4133.07 U2.2
  Bottom Layer w30: v2(4520,3190) 4667.2,3042.8 D3.1
NetD4_1: 
NetD6_1: 
NetR_boot1_2: R_boot1.2 R_enable1.2 | length 382.1
  Top Layer w10: R_enable1.2 8405,5604.06 R_boot1.2
REC_Volt: C2.2 C3.2 C4.2 J_ACDC1.1 J_ACDC1.2 U1.1 U2.1 | length 8660.8
  Top Layer w10: C2.2@2844.06,6040 C2.2
  Top Layer w30: U1.1 1350.35,4389.65 960,4780 960,5620 1530,6190 J_ACDC1.1 ; C2.2@2844.06,6040 J_ACDC1.2 2025,5855.86 1955,5785.86 1955,5440 2315,5080 3090,5080 3785.35,4384.65 U2.1 ; C2.2 C3.2 C4.2
  Bottom Layer w30: J_ACDC1.1 1875,6190 J_ACDC1.2
RXD0: B1.36 J_Connector1.3 | length 2723.2
  Top Layer w10: v1(8345,4990) 8439.06,5084.06 B1.36
  Bottom Layer w10: J_Connector1.3 7595,6220 7290,5915 7290,5375 7675,4990 v1(8345,4990)
STEP: B1.4 J2.1 | length 3169.2
  Top Layer w10: B1.4 7984.06,5134.06 v1(7985,5135) ; v1(8903.43,5208.43) 8903.43,5933.43 9695,6725 J2.1
  Bottom Layer w10: v1(7985,5135) 8830,5135 v1(8903.43,5208.43)
TXD0: B1.37 J_Connector1.2 | length 3428.2
  Top Layer w10: B1.37 8625.94,5134.06 8695,5065 v1(8695,5020) ; v1(9095,5945) 9210,5945 v1(9365,5790)
  Bottom Layer w10: J_Connector1.2 7955,6120 8130,5945 v1(9095,5945) ; v1(8695,5020) 8935,5020 9005,4950 9180,4950 9565,5335 9565,5590 v1(9365,5790)
Vin: 1.8 Cadj.1 Cin.1 Cvcc1.2 Radj.1 Rsns.1 Rt.1 | length 4328.8
  Top Layer w10: 1.8 1.8@5550.31,1778.39 ; 5686.93,1915 1.8@5550.31,1778.39 ; 6143.39,1778.39 1.8@5550.31,1778.39
  Top Layer w30: 5686.93,1915 5810,1915 6175,2280 Rsns.1 ; 6143.39,1778.39 6185,1820 Rt.1 Radj.1 6704.06,1865.94 6840,1730 6840,1525 6975,1390 7160,1390 7351.1,1581.1 Cvcc1.2 7430,1665 7450,1685 7450,1712.5 ; Cin.1 7420,2143.19 7580,1983.19 7580,1770 7522.5,1712.5 7450,1712.5 ; Cadj.1 7425,1765 7450,1740 7450,1712.5
pads on no net: B1.7 B1.9 B1.11 B1.13 B1.14 B1.16 B1.18 B1.20 B1.22 B1.24 B1.26 B1.28 B1.29 B1.30 B1.31 B1.32 B1.33 B1.34 B1.35 B1.39 J5V.2 J6.2 J6.3 J6.4 SW_boot1.MH1 SW_boot1.MH2 SW_boot1.MH3 SW_EN1.MH1 SW_EN1.MH2 SW_EN1.MH3